# Altium PCB SFarm.PcbDoc (part 1 of 2)
Units mm, origin at the board's own origin, x right, y up, seen from the top; angles counter-clockwise.
Board outline 143 x 80 mm, 2 copper layers (Top Layer, Bottom Layer), stack 1.571 mm thick; 89 components, 71 nets, 378 pads, 342 vias.
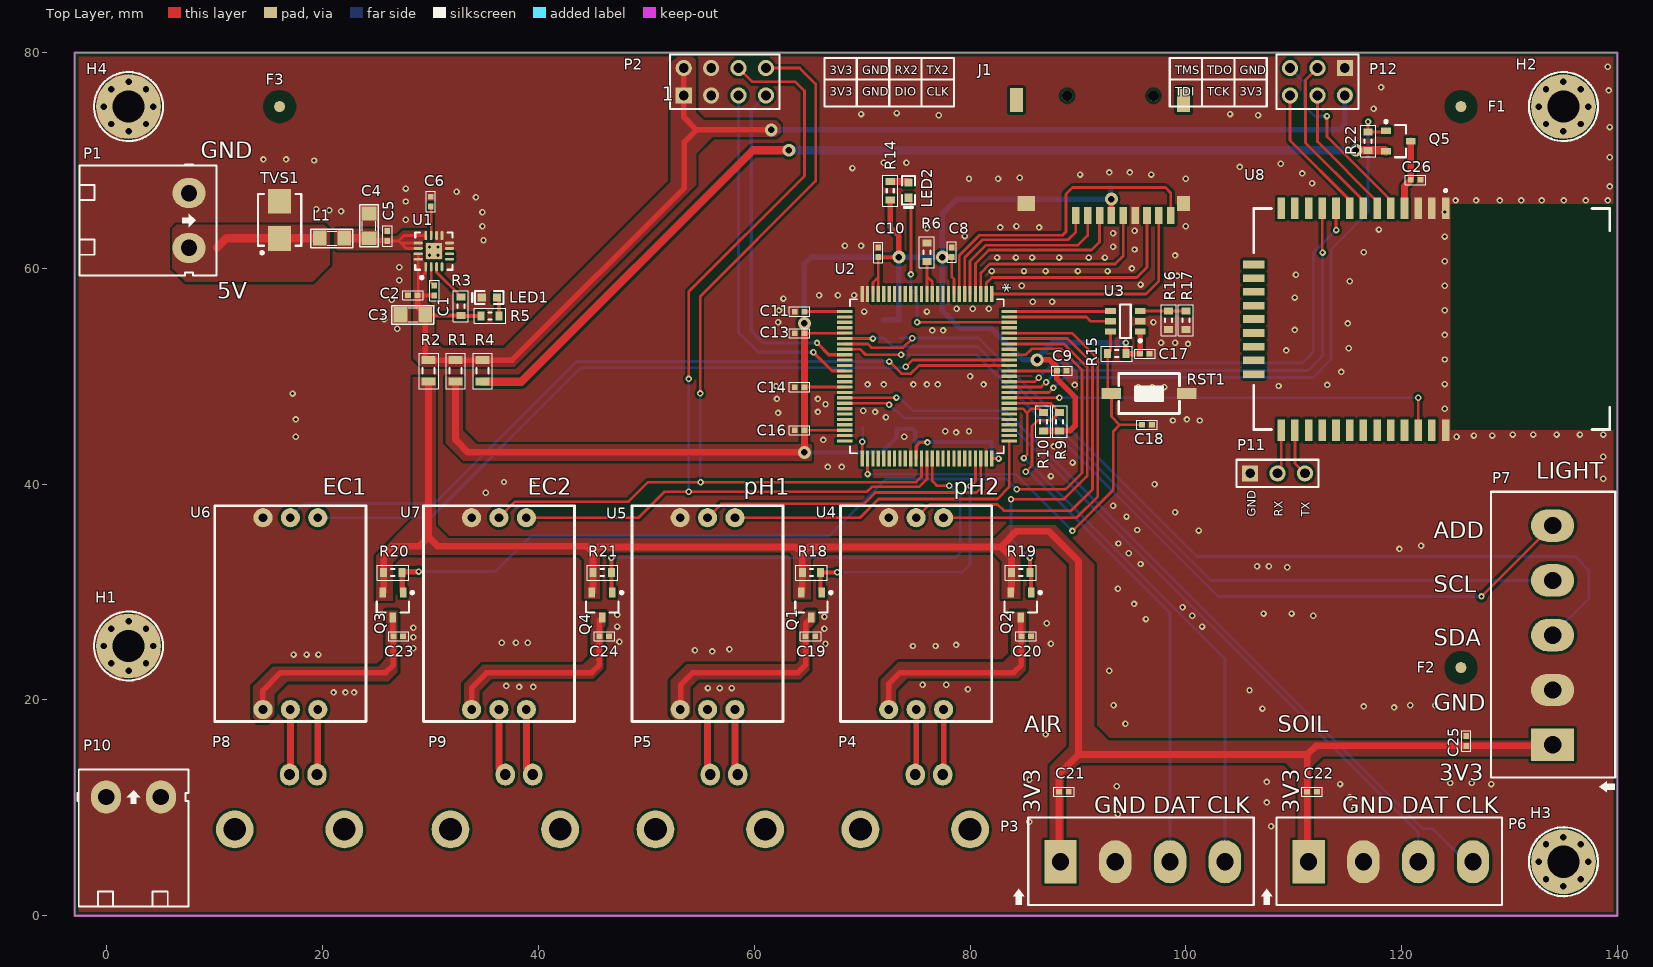
[diagram p0: Top Layer view]
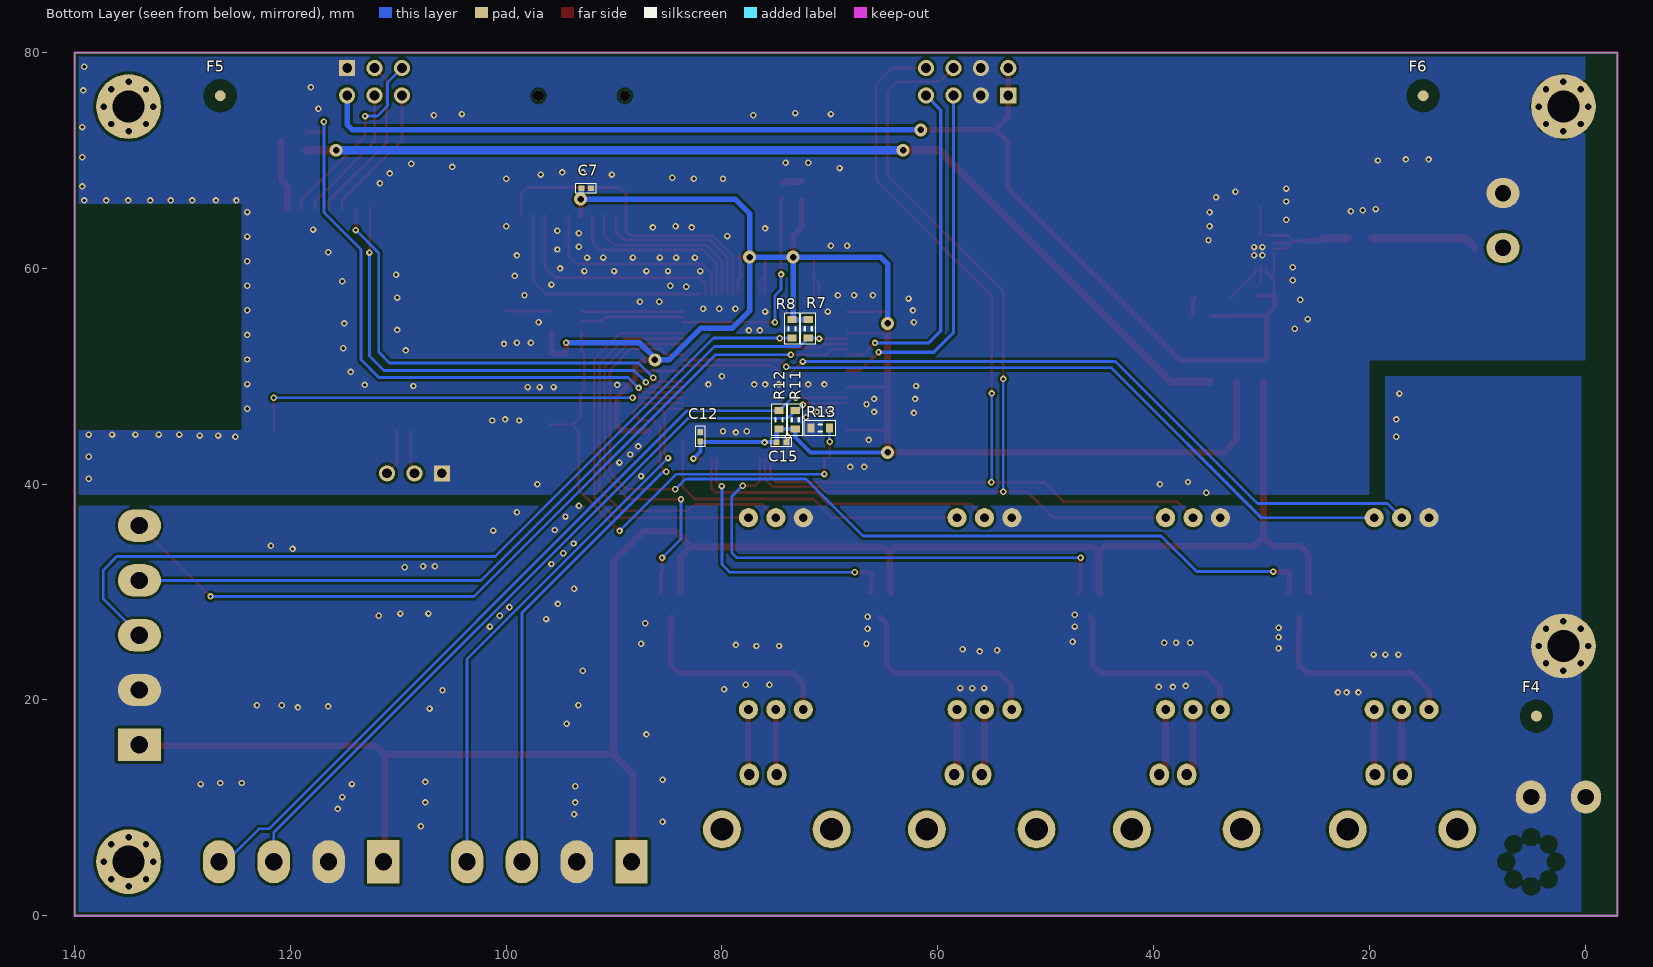
[diagram p1: Bottom Layer view, seen from below]
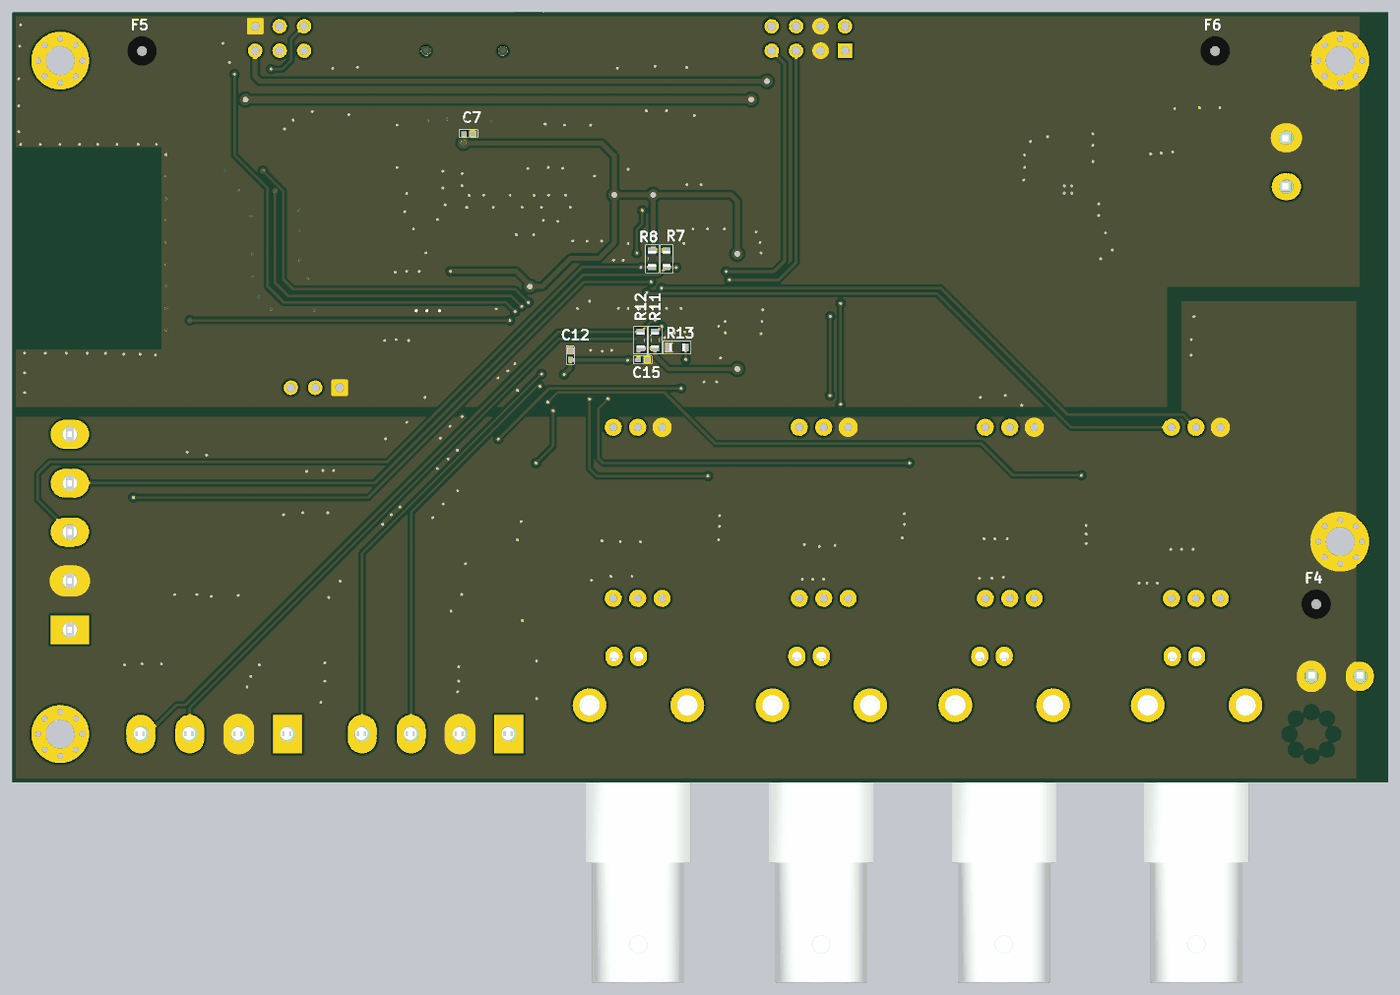
[diagram p2: 3D render of the assembled board from below, using the file's embedded part models]

## Layer stack, top to bottom
Top Solder: solder mask 0.0102, Solder Resist, Dk 3.5
Top Layer: signal copper 0.0356
Dielectric 1: dielectric 1.5, FR-4, Dk 4.8
Bottom Layer: signal copper 0.0356
Bottom Solder: solder mask 0.0102, Solder Resist, Dk 3.5

## Board outline
-3,0 140,0 140,80 -3,80

## Design rules (kind name [scope] priority, off if disabled: settings)
Clearance Clearance_PR [All vs InPolygon] p1: gap=0.254 ignorepadtopadclearanceinfootprint=FALSE
Clearance [All] p2: gap=0.152 ignorepadtopadclearanceinfootprint=FALSE
HoleSize [All] p1: absolutevalues=TRUE maxlimit=25.4 minlimit=0.025 maxpercent=80.000 minpercent=20.000
HoleToHoleClearance [All] p1: gap=0.025 allowstackedmicrovias=TRUE
MinimumSolderMaskSliver [All] p1: minsoldermaskwidth=0.025
PolygonConnect [All] p1: connectstyle=Direct reliefconductorwidth=0.254 reliefentries=4 polygonreliefangle="90 Angle" airgapwidth=0.254
RoutingVias [All] p1: holewidth=0.3 width=0.6 viastyle="Through Hole" minholewidth=0.3 minwidth=0.6 maxholewidth=0.6 maxwidth=1.2
SilkToSilkClearance [All] p1: silktosilkclearance=0.025
SilkToSolderMaskClearance [IsPad] p1: minsilkscreentomaskgap=0.025 clearancetoexposedcopper=TRUE
SolderMaskExpansion [All] p1: expansion=0.102
Width [All] p1: maxlimit=1.016 minlimit=0.203 preferedwidth=0.305
25 further rules are at their usual default settings.

## Classes and differential pairs
component class CONNECTIVITY: C26 P11 P12 Q5 R22 U8
component class MCU: C7 C8 C9 C10 C11 C12 C13 C14 C15 C16 C17 C18 J1 LED2 P2 R6 R7 R8 R9 R10 R11 R12 R13 R14 R15 R16 R17 RST1 U2 U3
component class POWER: C1 C2 C3 C4 C5 C6 F1 F2 F3 H1 H2 H3 H4 L1 LED1 P1 R1 R2 R3 R4 R5 TVS1 U1
component class SENSOR: C19 C20 C21 C22 C23 C24 C25 P3 P4 P5 P6 P7 P8 P9 P10 Q1 Q2 Q3 Q4 R18 R19 R20 R21 U4 U5 U6 U7

## Components (designator, comment, footprint, x,y, rotation, side; value= is the part's Value field where it differs from the comment)
C1 "0.1µF" C0402M 30.35,57.95 r270 top
C2 "0.1µF" C0402M 28.35,57.5 r0 top
C3 "10µF" "0805 cap" 27.214,55.7 r0 top
C4 "10µF" "0805 cap" 24.3,65.086 r270 top
C5 "0.1µF" C0402M 26,63 r270 top
C6 "0.1µF" C0402M 30.023,66.192 r270 top
C7 "0.1µF" C0402M 92.583,67.412 r180 bottom
C8 "0.1µF" C0402M 78.3,61.5 r90 top
C9 "0.1µF" C0402M 88.5,50.5 r0 top
C10 "0.1µF" C0402M 71.501,61.493 r90 top
C11 "0.1µF" C0402M 64.2,56 r180 top
C12 "0.1µF" C0402M 81.991,44.399 r90 bottom
C13 "0.1µF" C0402M 64.2,54 r180 top
C14 "0.1µF" C0402M 64.2,49 r0 top
C15 "0.1µF" C0402M 74.473,43.891 r180 bottom
C16 "0.1µF" C0402M 64.2,45 r0 top
C17 "0.1µF" C0402M 96.2,52.1 r180 top
C18 "0.1µF" C0402M 96.4,45.5 r180 top
C19 "0.1µF" C0402M 65.2,25.9 r180 top
C20 "0.1µF" C0402M 85.2,25.9 r180 top
C21 "0.1µF" C0402M 88.7,11.5 r180 top
C22 "0.1µF" C0402M 111.7,11.5 r180 top
C23 "0.1µF" C0402M 27,25.9 r180 top
C24 "0.1µF" C0402M 46.1,25.9 r180 top
C25 "0.1µF" C0402M 126,16.2 r270 top
C26 "0.1uF" C0402M 121.3,68.2 r180 top
F1 "" fiducials 125.5,75 r0 top
F2 "" fiducials 125.5,23 r0 top
F3 "" fiducials 16,75 r0 top
F4 "" fiducials 4.5,18.5 r180 bottom (schematic designator F3)
F5 "" fiducials 126.5,76 r180 bottom (schematic designator F3)
F6 "" fiducials 15,76 r180 bottom (schematic designator F3)
H1 "HoleM3" HOLEM3via 2,25 r0 top
H2 "HoleM3" HOLEM3via 135,75 r0 top
H3 "HoleM3" HOLEM3via 135,5 r0 top
H4 "HoleM3" HOLEM3via 2,75 r0 top
J1 "Header 11" TF_V3 84.3,75.6 r180 top
L1 "42" 0805F 19.714,62.8 r0 top
LED1 "LedRed0603" 0603LED-RED 35.5,57.3 r180 top
LED2 "LedGreen0603" 0603LED-GREEN 74.3,67.3 r270 top
P1 "Header 2" HED2T 7.6,66.98 r270 top
P2 "Header 4X2H" HDR2X4 53.46,76.03 r0 top
P3 "Header 4H" TERMINAL4_5.08 96,5 r0 top
P4 "BNC connector" BNC 74.92,13.08 r180 top
P5 "BNC connector" BNC 55.92,13.08 r180 top
P6 "Header 4H" TERMINAL4_5.08 119,5 r0 top
P7 "Header 5" TERMINAL5_5.08 134,26 r90 top
P8 "BNC connector" BNC 16.92,13.08 r180 top
P9 "BNC connector" BNC 36.92,13.08 r180 top
P10 "Header 2" HED2T -0.08,11 r0 top
P11 "Header 3" HDR1X3 108.5,41 r0 top
P12 "Header 3X2" HDR2X3 112.2,77.3 r180 top
Q1 "AO3401" SOT23-3N 65.3,28.8 r270 top
Q2 "AO3401" SOT23-3N 84.7,28.8 r270 top
Q3 "AO3401" SOT23-3N 26.5,28.8 r270 top
Q4 "AO3401" SOT23-3N 45.9,28.8 r270 top
Q5 "AO3401" SOT23-3N 119.7,71.8 r0 top
R1 "0" R0805M 32.3,50.5 r270 top
R2 "0" R0805M 29.8,50.5 r270 top
R3 "1.5k" R0603M 32.8,56.5 r270 top
R4 "0" R0805M 34.8,50.5 r270 top
R5 "1k" R0603M 35.5,55.6 r180 top
R6 "10k" R0603M 76,61.5 r270 top
R7 "10k" R0603M 72,54.4 r90 bottom
R8 "10k" R0603M 73.5,54.4 r90 bottom
R9 "10k" R0603M 88.3,45.8 r270 top
R10 "10k" R0603M 86.8,45.8 r270 top
R11 "10k" R0603M 73.2,45.956 r270 bottom
R12 "10k" R0603M 74.7,45.956 r270 bottom
R13 "0.0" R0603M 70.9,45.2 r180 bottom
R14 "1k" R0603M 72.6,67.2 r90 top
R15 "10k" R0603M 93.6,52.1 r180 top
R16 "187k" R0603M 98.4,55.2 r90 top
R17 "182k" R0603M 100,55.2 r90 top
R18 "10k" R0603M 65.3,31.8 r180 top
R19 "10k" R0603M 84.7,31.8 r180 top
R20 "10k" R0603M 26.5,31.8 r180 top
R21 "10k" R0603M 45.9,31.8 r180 top
R22 "10k" R0603M 116.9,71.8 r270 top
RST1 "Button" SWSMD 96.6,48.4 r180 top
TVS1 "SMBJ7.0A" DIOM4436X26N 16,64.5 r90 top
U1 "TPS7A7100" QFN16 30.3,61.6 r90 top
U2 "MK64FN1M0VLL12" LQFP-100_14X14X1 76,50 r270 top
U3 "TPL5010-Q1" SOT23-6 94.4,55.1 r180 top
U4 "pH AFE" "pH AFE" 75,28 r90 top
U5 "pH AFE" "pH AFE" 55.667,28 r90 top
U6 "pH AFE" "pH AFE" 17,28 r90 top
U7 "pH AFE" "pH AFE" 36.333,28 r90 top
U8 "VZIGMOD1" VZIGMOD2 106.3,65.56 r270 top

## Footprints (in the part's own frame and the unit in brackets; to place one, negate y for a bottom-side part, rotate by r counter-clockwise, add the part's x,y. Pads: shape width x height; smd on the part's side, far side on the other; paste and mask are expansions set on the pad)
0603LED-GREEN [mil]
  rect 30x30 smd: 1(-26,0) 2(30,0)
  silkscreen extent -50,-24 65,24, body extent -29,-16 33,16, height 24
0603LED-RED [mil]
  rect 30x30 smd: 1(-26,0) 2(30,0)
  silkscreen extent -50,-24 65,24, body extent -31,-16 32,16, height 24
"0805 cap" [mil]
  rect 50x55 smd: 1(0,0) 2(90,0)
  silkscreen extent -32,-34 121,33, body extent 5,-27 85,23, height 24
0805F [mil]
  rect 50x55 smd: 1(0,0) 2(90,0)
  silkscreen extent -32,-34 121,33, body extent 6,-27 85,23, height 33
BNC [mm] "BNC connector"
  oval 1.778x2.032 hole 1: 1(0,0) 2(-2.54,0)
  round 3.5 hole 2.1: 3(-5.08,5.08) 3(5.08,5.08)
  body extent -7.41,-1.82 7.35,33.93, height 15.21
C0402M [mm] "Capacitor 0402"
  rect 0.55x0.51 smd: 1(-0.45,0) 2(0.45,0)
  silkscreen extent -0.95,-0.43 0.95,0.43, body extent -0.53,-0.28 0.53,0.27, height 0.55
DIOM4436X26N [mm] "Molded Diode, 2-Leads, Body 4.40x3.62mm, IPC Medium Density"
  rect 2.3x2.15 smd: 1(1.725,0) 2(-1.725,0)
  silkscreen extent -3.17,-2 2.4,2, body extent -2.6,-1.97 2.6,1.97, height 2.61
fiducials [mil]
  round 40 smd mask+40: ""(0,0)
  Top Layer pour cut-out: 0,-60 -22.96,-55.43 -42.43,-42.43 -55.43,-22.96 -60,0 -60,0 -55.43,22.96 -42.43,42.43 -22.96,55.43 0,60 0,60 22.96,55.43 42.43,42.43 55.43,22.96 60,0 60,0 55.43,-22.96 42.43,-42.43 22.96,-55.43 0,-60
HDR1X3 [mm] "Connector; Header; 3 Position"
  rect 1.5x1.5 hole 0.9: 1(-2.54,0)
  round 1.5 hole 0.9: 2(0,0) 3(2.54,0)
  silkscreen extent -3.81,-1.27 3.81,1.27
HDR2X3 [mm] "Connector; Header; 3x2 Position"
  rect 1.5x1.5 hole 0.9: 1(-2.54,-1.27)
  round 1.5 hole 0.9: 2(-2.54,1.27) 3(0,-1.27) 4(0,1.27) 5(2.54,-1.27) 6(2.54,1.27)
  silkscreen extent -3.81,-2.54 3.81,2.54
HDR2X4 [mm] "Connector; Header; 4x2 Position"
  rect 1.5x1.5 hole 0.9: 1(0,0)
  round 1.5 hole 0.9: 2(0,2.54) 3(2.54,0) 4(2.54,2.54) 5(5.08,0) 6(5.08,2.54) 7(7.62,0) 8(7.62,2.54)
  silkscreen extent -1.27,-1.27 8.89,3.81
HED2T [mil] "Header 2, 2 pin, hight 300mil, Pin to Pin 200, Colour Green"
  oval 110x120 hole 60: 1(0,0) 2(200,0)
  silkscreen extent -105,-400 300,100, body extent -97,-399 297,73, height 334
HOLEM3via [mm]
  round 6 hole 3: ""(0,0)
  silkscreen extent -3.19,-3.2 3.2,3.2
LQFP-100_14X14X1 [mm]
  rect 1.461x0.3 smd: 1(-7.625,6) 2(-7.625,5.5) 3(-7.625,5) 4(-7.625,4.5) 5(-7.625,4) 6(-7.625,3.5) 7(-7.625,3) 8(-7.625,2.5) 9(-7.625,2) 10(-7.625,1.5) 11(-7.625,1) 12(-7.625,0.5) 13(-7.625,0) 14(-7.625,-0.5) 15(-7.625,-1) 16(-7.625,-1.5) 17(-7.625,-2) 18(-7.625,-2.5) 19(-7.625,-3) 20(-7.625,-3.5) 21(-7.625,-4) 22(-7.625,-4.5) 23(-7.625,-5) 24(-7.625,-5.5) 25(-7.625,-6) 51(7.625,-6) 52(7.625,-5.5) 53(7.625,-5) 54(7.625,-4.5) 55(7.625,-4) 56(7.625,-3.5) 57(7.625,-3) 58(7.625,-2.5) 59(7.625,-2) 60(7.625,-1.5) 61(7.625,-1) 62(7.625,-0.5) 63(7.625,0) 64(7.625,0.5) 65(7.625,1) 66(7.625,1.5) 67(7.625,2) 68(7.625,2.5) 69(7.625,3) 70(7.625,3.5) 71(7.625,4) 72(7.625,4.5) 73(7.625,5) 74(7.625,5.5) 75(7.625,6)
  rect 0.3x1.461 smd: 26(-6,-7.625) 27(-5.5,-7.625) 28(-5,-7.625) 29(-4.5,-7.625) 30(-4,-7.625) 31(-3.5,-7.625) 32(-3,-7.625) 33(-2.5,-7.625) 34(-2,-7.625) 35(-1.5,-7.625) 36(-1,-7.625) 37(-0.5,-7.625) 38(0,-7.625) 39(0.5,-7.625) 40(1,-7.625) 41(1.5,-7.625) 42(2,-7.625) 43(2.5,-7.625) 44(3,-7.625) 45(3.5,-7.625) 46(4,-7.625) 47(4.5,-7.625) 48(5,-7.625) 49(5.5,-7.625) 50(6,-7.625) 76(6,7.625) 77(5.5,7.625) 78(5,7.625) 79(4.5,7.625) 80(4,7.625) 81(3.5,7.625) 82(3,7.625) 83(2.5,7.625) 84(2,7.625) 85(1.5,7.625) 86(1,7.625) 87(0.5,7.625) 88(0,7.625) 89(-0.5,7.625) 90(-1,7.625) 91(-1.5,7.625) 92(-2,7.625) 93(-2.5,7.625) 94(-3,7.625) 95(-3.5,7.625) 96(-4,7.625) 97(-4.5,7.625) 98(-5,7.625) 99(-5.5,7.625) 100(-6,7.625)
  silkscreen extent -7.13,-7.13 7.13,7.13, body extent -6.86,-6.86 6.86,6.86, height 0.3
"pH AFE" [mil]
  round 70 hole 31.5: 1(-350,100) 2(-350,0) 3(-350,-100) 4(350,-100) 5(350,0) 6(350,100)
  silkscreen extent -394,-276 394,276, body extent -394,-275 393,276, height 79
QFN16 [mm] "QFN, 16-Leads, Body 3.00x3.00mm, Pitch 0.50mm, Thermal Pad 1.66x1.66mm, IPC Medium Density"
  oval 0.85x0.25 smd: 1(-1.45,0.75) 2(-1.45,0.25) 3(-1.45,-0.25) 4(-1.45,-0.75) 9(1.45,-0.75) 10(1.45,-0.25) 11(1.45,0.25) 12(1.45,0.75)
  oval 0.25x0.85 smd: 5(-0.75,-1.45) 6(-0.25,-1.45) 7(0.25,-1.45) 8(0.75,-1.45) 13(0.75,1.45) 14(0.25,1.45) 15(-0.25,1.45) 16(-0.75,1.45)
  rect 1.5x1.5 smd: 17(0,0)
  silkscreen extent -2.57,-1.73 1.73,1.73, body extent -1.58,-1.58 1.58,1.58, height 1
R0603M [mm] "Chip Resistor 0603"
  rect 0.65x0.85 smd: 1(-0.85,0) 2(0.85,0)
  silkscreen extent -1.45,-0.7 1.45,0.7, body extent -0.8,-0.4 0.8,0.4, height 0.55
R0805M [mm] "Chip Resistor 0805"
  rect 0.75x1.3 smd: 1(-1,0) 2(1,0)
  silkscreen extent -1.65,-0.9 1.65,0.9, body extent -1,-0.63 1,0.63, height 0.6
SOT23-3N [mm] "SOT23, 3-Leads, Body 2.90x2.30mm, Pitch 0.95mm, IPC Medium Density"
  rect 0.9x0.6 smd: 1(-1.15,0.95) 2(-1.15,-0.95) 3(1.15,0)
  silkscreen extent -1.27,-1.5 0.7,1.93, body extent -0.7,-1.5 0.7,1.5, height 1.1
SOT23-6 [mm] "SOT23, 6-Leads, Body 2.90x2.80mm, Pitch 0.95mm, IPC Medium Density"
  rect 1x0.6 smd: 1(-1.375,0.95) 2(-1.375,0) 3(-1.375,-0.95) 4(1.375,-0.95) 5(1.375,0) 6(1.375,0.95)
  silkscreen extent -1.5,-1.55 0.5,1.92, body extent -0.88,-1.52 0.87,1.53, height 1.45
SWSMD [mm]
  rect 1.8x1 smd: 1(-3.5,0) 2(3.5,0)
  silkscreen extent -2.82,-1.85 2.82,1.85, body extent -3.05,-1.85 3.05,1.85, height 2.5
TERMINAL4_5.08 [mm]
  rect 3x4 hole 1.6: 1(-7.62,0)
  oval 3x4 hole 1.6: 2(-2.54,0) 3(2.54,0) 4(7.62,0)
  silkscreen extent -12,-4 10.3,4.1, body extent -10.64,-4 10.25,4.1, height 10
TERMINAL5_5.08 [mm]
  rect 3x4 hole 1.6: 1(-10.16,0)
  oval 3x4 hole 1.6: 2(-5.08,0) 3(0,0) 4(5.08,0) 5(10.16,0)
  silkscreen extent -14.54,-5.8 13.3,5.7, body extent -13.29,-5.9 13.29,5.72, height 18
TF_V3 [mm]
  round 1 hole 1: 0(-12.7,-0.4) 0(-4.7,-0.4)
  rect 0.7x1.6 smd: 1(-5.5,10.7) 2(-6.6,10.7) 3(-7.7,10.7) 4(-8.8,10.7) 5(-9.9,10.7) 6(-11,10.7) 7(-12.1,10.7) 8(-13.2,10.7) 9(-14.3,10.7)
  rect 1.2x1.4 smd: 10(-15.5,9.6)
  rect 1.6x1.4 smd: 11(-0.9,9.6)
  rect 1.2x2.2 smd: 12(0,0) 13(-15.5,0)
  body extent -15.79,-4.46 0.31,10.54, height 1.85
VZIGMOD2 [mm]
  rect 2x0.7 smd: 1(0,17.78) 2(0,16.51) 3(0,15.24) 4(0,13.97) 5(0,12.7) 6(0,11.43) 7(0,10.16) 8(0,8.89) 9(0,7.62) 10(0,6.35) 11(0,5.08) 12(0,3.81) 13(0,2.54) 23(20.56,2.54) 24(20.56,3.81) 25(20.56,5.08) 26(20.56,6.35) 27(20.56,7.62) 28(20.56,8.89) 29(20.56,10.16) 30(20.56,11.43) 31(20.56,12.7) 32(20.56,13.97) 33(20.56,15.24) 34(20.56,16.51) 35(20.56,17.78)
  rect 0.7x2 smd: 14(5.2,0) 15(6.47,0) 16(7.74,0) 17(9.01,0) 18(10.25,0) 19(11.55,0) 20(12.82,0) 21(14.09,0) 22(15.36,0)
  silkscreen extent -1.79,0 20.5,33, body extent 0,0 20.5,33, height 2.05

## Part data
C1 C2 C5 C6 C7 C8 C9 C10 C11 C12 C13 C14 C15 C16 C17 C18 C19 C20 C21 C22 C23 C24 C25: library part CAP0.1u0402, "CAP CER 0.1UF 10V X7R 0402", Manufacturer="Taiyo Yuden", Manufacturer Part Number=LMK105B7104KVHF, Operating Temperature="-55°C ~ 125°C", Package / Case="0402 (1005 Metric)", Ratings=AEC-Q200, Supplier Part Number 1=587-3769-1-ND, Temperature Coefficient=X7R, Tolerance=±10%, Voltage - Rated=10V, Applications=Automotive, Capacitance=0.1µF, Category=Capacitors, ComponentLink1Description=http://www.yuden.co.jp/productdata/catalog/en/mlcc_all_hq_e.pdf, ComponentLink1URL=http://www.yuden.co.jp/productdata/catalog/en/mlcc_all_hq_e.pdf, Features=-, Height - Seated (Max)=-, Lead Spacing=-, Lead Style=-, Mounting Type="Surface Mount, MLCC", Packaging="Cut Tape (CT)", Part Status=Active, Pricing 1="1=0.1, 10=0.05, 100=0.0223, 500=0.01594, 1000=0.01252, 2500=0.01138, 5000=0.01047 (USD)", RoHS="RoHS Compliant", Size / Dimension="0.039\" L x 0.020\" W (1.00mm x 0.50mm)", Stock 1=23930, Supplier 1=Digi-Key, Thickness (Max)="0.022\" (0.55mm)"
C3 C4: library part cap10u0805, "CAP CER 10UF 16V X7R 0805", Manufacturer="Taiyo Yuden", Manufacturer Part Number=EMK212BB7106MG-T, Operating Temperature="-55°C ~ 125°C", Package / Case="0805 (2012 Metric)", Ratings=-, Supplier Part Number 1=587-3319-1-ND, Temperature Coefficient=X7R, Tolerance=±20%, Voltage - Rated=16V, Applications="General Purpose", Capacitance=10µF, Category=Capacitors, ComponentLink1Description=http://www.yuden.co.jp/productdata/catalog/en/mlcc06_e.pdf, ComponentLink1URL=http://www.yuden.co.jp/productdata/catalog/en/mlcc06_e.pdf, Features=-, Height - Seated (Max)=-, Lead Spacing=-, Lead Style=-, Mounting Type="Surface Mount, MLCC", Packaging="Cut Tape (CT)", Part Status=Active, Pricing 1="1=0.51, 10=0.351, 100=0.2106, 500=0.15798, 1000=0.1334 (USD)", RoHS="RoHS Compliant", Size / Dimension="0.079\" L x 0.049\" W (2.00mm x 1.25mm)", Stock 1=221600, Supplier 1=Digi-Key, Thickness (Max)="0.053\" (1.35mm)"
C26: library part CAP0.1u0402, "CAP CER 0.1UF 16V X7R 0402", Manufacturer="Samsung Electro-Mechanics", Manufacturer Part Number=CL05B104KO5NNNC, Operating Temperature="-55°C ~ 125°C", Package / Case="0402 (1005 Metric)", Ratings=-, Supplier Part Number 1=1276-1001-6-ND, Temperature Coefficient=X7R, Tolerance=±10%, Voltage - Rated=16V, Applications="General Purpose", Category=Capacitors, ComponentLink1Description=http://www.samsungsem.com/kr/support/product-search/mlcc/CL05B104KO5NNNC.jsp, ComponentLink1URL=http://www.samsungsem.com/kr/support/product-search/mlcc/CL05B104KO5NNNC.jsp, Features=-, Height - Seated (Max)=-, Lead Spacing=-, Lead Style=-, Module=Connectivity, Mounting Type="Surface Mount, MLCC", Notification="Current market demand for these product types have resulted in fluctuating and extending lead times. Lead times may differ.", Packaging=Digi-Reel®, Part Status=Active, Pricing 1="1=0.1, 10=0.03, 100=0.0134, 500=0.00958, 1000=0.00753, 2500=0.00684, 5000=0.0063 (USD)", RoHS="RoHS Compliant", Size / Dimension="0.039\" L x 0.020\" W (1.00mm x 0.50mm)", Stock 1=100000, Supplier 1=Digi-Key, Thickness (Max)="0.022\" (0.55mm)"
F1 F2 F3 F4 F5 F6: library part Fiducials
J1: "Header, 11-Pin", LatestRevisionDate=17-Jul-2002, LatestRevisionNote="Re-released for DXP Platform.", Module=Micro-SD, Publisher="Altium Limited"
L1: library part "Ferrite Bead", "FERRITE BEAD 42 OHM 0805 1LN", Current Rating (Max)=4A, DC Resistance (DCR) (Max)="8 mOhm", Impedance @ Frequency="42 Ohm @ 100MHz", Manufacturer="Taiyo Yuden", Manufacturer Part Number=FBMJ2125HS420-TV, Operating Temperature="-40°C ~ 125°C", Package / Case="0805 (2012 Metric)", Ratings=AEC-Q200, Supplier Part Number 1=587-3851-6-ND, Category=Filters, ComponentLink1Description=http://ds.yuden.co.jp/TYCOMPAS/ut/detail.do?productNo=FBMJ2125HS420-TV&fileName=FBMJ2125HS420-TV_SS&mode=specSheetDownload, ComponentLink1URL=http://ds.yuden.co.jp/TYCOMPAS/ut/detail.do?productNo=FBMJ2125HS420-TV&fileName=FBMJ2125HS420-TV_SS&mode=specSheetDownload, Filter Type="Power Line", Height (Max)="0.041\" (1.05mm)", Mounting Type="Surface Mount", Number of Lines=1, Packaging=Digi-Reel®, Part Status=Active, Pricing 1="1=0.2, 10=0.154, 25=0.1276, 50=0.11, 100=0.099, 250=0.0836, 500=0.0748, 1000=0.0638 (USD)", RoHS="RoHS Compliant", Size / Dimension="0.079\" L x 0.049\" W (2.00mm x 1.25mm)", Stock 1=2013, Supplier 1=Digi-Key
LED1: "LED RED CLEAR 0603 SMD", Color=Red, Current - Test=20mA, Lens Color=Colorless, Manufacturer="Everlight Electronics Co Ltd", Manufacturer Part Number=QTLP600C7TR, Millicandela Rating=20mcd, Package / Case="0603 (1608 Metric)", Supplier Part Number 1=1080-1400-1-ND, Voltage - Forward (Vf) (Typ)=1.9V, Category=Optoelectronics, ComponentLink1Description=http://media.digikey.com/pdf/Data%20Sheets/Everlight%20PDFs/QTLP600C.pdf, ComponentLink1URL=http://media.digikey.com/pdf/Data%20Sheets/Everlight%20PDFs/QTLP600C.pdf, Features=-, Height (Max)=0.80mm, Lens Style/Size="Rectangle with Flat Top, 1.20mm x 0.80mm", Lens Transparency=Clear, Mounting Type="Surface Mount", Packaging="Cut Tape (CT)", Part Status=Active, Pricing 1="1=0.41, 10=0.297, 25=0.2276, 100=0.1485, 250=0.10892, 500=0.0924, 1000=0.0759 (USD)", RoHS="RoHS Compliant", Size / Dimension="1.60mm L x 0.80mm W", Stock 1=19325, Supplier 1=Digi-Key, Viewing Angle=100°, Wavelength - Dominant=645nm, Wavelength - Peak=660nm
LED2: "LED GREEN CLEAR 0603 SMD", Color=Green, Current - Test=20mA, Lens Color=Colorless, Manufacturer="Everlight Electronics Co Ltd", Manufacturer Part Number=QTLP601C4TR, Millicandela Rating=15mcd, Package / Case="0603 (1608 Metric)", Supplier Device Package=0603, Supplier Part Number 1=1080-1405-1-ND, Voltage - Forward (Vf) (Typ)=2.1V, Category=Optoelectronics, ComponentLink1Description=http://media.digikey.com/pdf/Data%20Sheets/Everlight%20PDFs/QTLP601C-2,3,4,7,B.pdf, ComponentLink1URL=http://media.digikey.com/pdf/Data%20Sheets/Everlight%20PDFs/QTLP601C-2,3,4,7,B.pdf, Features=-, Height (Max)=0.60mm, Lens Style/Size="Rectangle with Flat Top, 1.20mm x 0.80mm", Lens Transparency=Clear, Mounting Type="Surface Mount", Packaging="Cut Tape (CT)", Part Status=Active, Pricing 1="1=0.51, 10=0.366, 25=0.2808, 100=0.1832, 250=0.13432, 500=0.11396, 1000=0.09361 (USD)", RoHS="RoHS Compliant", Size / Dimension="1.60mm L x 0.80mm W", Stock 1=19080, Supplier 1=Digi-Key, Viewing Angle=120°, Wavelength - Dominant=570nm, Wavelength - Peak=565nm
P1 P10: "Header, 2-Pin", LatestRevisionDate=17-Jul-2002, LatestRevisionNote="Re-released for DXP Platform.", Publisher="Altium Limited"
P2: "Header, 4-Pin, Dual row, Right Angle", LatestRevisionDate=17-Jul-2002, LatestRevisionNote="Re-released for DXP Platform.", Publisher="Altium Limited"
P3 P6: "TERM BLOCK PLUG 4POS STR 5.08MM", Color=Green, Current - IEC=12A, Manufacturer="Phoenix Contact", Manufacturer Part Number=1758377, Material Flammability Rating="UL94 V-0", Operating Temperature=-, Supplier Part Number 1=277-1966-ND, Category="Connectors, Interconnects", ComponentLink1Description=https://media.digikey.com/PDF/Data%20Sheets/Phoenix%20Contact%20PDFs/1758377.pdf, ComponentLink1URL=https://media.digikey.com/PDF/Data%20Sheets/Phoenix%20Contact%20PDFs/1758377.pdf, Contact Material=-, Contact Mating Finish=Tin, Contact Tail Length=-, Features="Positions Stamped, Retention Latches (Non-Wire Side)", Header Orientation=-, Housing Material="Polyamide (PA), Nylon", Ingress Protection=-, Insulation Height="0.591\" (15.00mm)", LatestRevisionDate=17-Jul-2002, LatestRevisionNote="Re-released for DXP Platform.", Mounting Type="Free Hanging (In-Line)", Number of Levels=1, Number of Positions=4, Packaging=Bulk, Part Status=Active, Pitch="0.200\" (5.08mm)", Plug Wire Entry=180°, Positions Per Level=4, Pricing 1="1=4.13, 10=3.949, 50=3.8412, 100=3.59, 250=3.30284, 500=3.0515, 1000=2.90793, 2500=2.7284 (USD)", Publisher="Altium Limited", RoHS="RoHS Compliant", Screw Size=M3, Stock 1=185, Supplier 1=Digi-Key, Termination Style="Screw - Clamping Yoke (Tension Sleeve)", Torque - Screw="0.5-0.6 Nm (4.4-5.3 Lb-In)", Type="Plug, Female Sockets", Wire Gauge or Range - AWG="12-30 AWG", Wire Gauge or Range - mm²=0.2-2.5mm², Wire Strip Length=7mm
P7: "TERM BLOCK PLUG 5POS STR 5.08MM", Color=Green, Current - IEC=12A, Manufacturer="Phoenix Contact", Manufacturer Part Number=1757048, Material Flammability Rating="UL94 V-0", Operating Temperature=-, Supplier Part Number 1=277-1014-ND, Category="Connectors, Interconnects", ComponentLink1Description=https://media.digikey.com/pdf/Data%20Sheets/Phoenix%20Contact%20PDFs/1757048.pdf, ComponentLink1URL=https://media.digikey.com/pdf/Data%20Sheets/Phoenix%20Contact%20PDFs/1757048.pdf, Contact Material=-, Contact Mating Finish=Tin, Contact Tail Length=-, Features="Retention Latches (Non-Wire Side)", Header Orientation=-, Housing Material="Polyamide (PA), Nylon", Ingress Protection=-, Insulation Height="0.591\" (15.00mm)", LatestRevisionDate=17-Jul-2002, LatestRevisionNote="Re-released for DXP Platform.", Mounting Type="Free Hanging (In-Line)", Number of Levels=1, Number of Positions=5, Packaging=Bulk, Part Status=Active, Pitch="0.200\" (5.08mm)", Plug Wire Entry=180°, Positions Per Level=5, Pricing 1="1=4.69, 10=4.488, 50=4.3656, 100=4.08, 250=3.75364, 500=3.46802, 1000=3.30483, 2500=3.1008 (USD)", Publisher="Altium Limited", RoHS="RoHS Compliant", Screw Size=M3, Stock 1=1718, Supplier 1=Digi-Key, Termination Style="Screw - Clamping Yoke (Tension Sleeve)", Torque - Screw="0.5-0.6 Nm (4.4-5.3 Lb-In)", Type="Plug, Female Sockets", Wire Gauge or Range - AWG="12-30 AWG", Wire Gauge or Range - mm²=0.2-2.5mm², Wire Strip Length=7mm
P11: "Header, 3-Pin", LatestRevisionDate=17-Jul-2002, LatestRevisionNote="Re-released for DXP Platform.", Publisher="Altium Limited"
P12: "Header, 3-Pin, Dual row", LatestRevisionDate=17-Jul-2002, LatestRevisionNote="Re-released for DXP Platform.", Publisher="Altium Limited"
Q1 Q2 Q3 Q4 Q5: library part MOSFET-P1, "P-Channel MOSFET"
R1 R2 R4: library part RES00805, "RES SMD 0.0 OHM JUMPER 1/8W 0805", Manufacturer="Panasonic Electronic Components", Manufacturer Part Number=ERJ-6GEY0R00V, Operating Temperature="-55°C ~ 155°C", Package / Case="0805 (2012 Metric)", Power (Watts)="0.125W, 1/8W", Resistance (Ohms)=0.0, Supplier Device Package=0805, Supplier Part Number 1=P0.0ACT-ND, Temperature Coefficient=-, Tolerance=Jumper, Category=Resistors, ComponentLink1Description=http://industrial.panasonic.com/www-cgi/jvcr13pz.cgi?E+PZ+3+AOA0001+ERJ6GEY0R00V+7+WW, ComponentLink1URL=http://industrial.panasonic.com/www-cgi/jvcr13pz.cgi?E+PZ+3+AOA0001+ERJ6GEY0R00V+7+WW, Composition="Thick Film", Failure Rate=-, Features="Automotive AEC-Q200", Height - Seated (Max)="0.028\" (0.70mm)", Packaging="Cut Tape (CT)", Part Status=Active, Pricing 1="1=0.1, 10=0.024, 25=0.0172, 50=0.0132, 100=0.0097, 250=0.00744, 500=0.00594, 1000=0.00437 (USD)", RoHS="RoHS Compliant", Size / Dimension="0.079\" L x 0.049\" W (2.00mm x 1.25mm)", Stock 1=562130, Supplier 1=Digi-Key
R3: library part RES1k50603, "RES SMD 1.5K OHM 1% 1/10W 0603", Manufacturer="Panasonic Electronic Components", Manufacturer Part Number=ERJ-3EKF1501V, Operating Temperature="-55°C ~ 155°C", Package / Case="0603 (1608 Metric)", Power (Watts)="0.1W, 1/10W", Supplier Device Package=0603, Supplier Part Number 1=P1.50KHCT-ND, Temperature Coefficient=±100ppm/°C, Tolerance=±1%, Category=Resistors, ComponentLink1Description=https://industrial.panasonic.com/cdbs/www-data/pdf/RDA0000/AOA0000C298.pdf, ComponentLink1URL=https://industrial.panasonic.com/cdbs/www-data/pdf/RDA0000/AOA0000C298.pdf, Composition="Thick Film", Failure Rate=-, Features="Automotive AEC-Q200", Height - Seated (Max)="0.022\" (0.55mm)", Packaging="Cut Tape (CT)", Part Status=Active, Pricing 1="1=0.1, 10=0.021, 100=0.0087, 1000=0.00389, 2500=0.00338 (USD)", Resistance (Ohms)=1.5k, RoHS="RoHS Compliant", Size / Dimension="0.063\" L x 0.031\" W (1.60mm x 0.80mm)", Stock 1=0, Supplier 1=Digi-Key
R5 R14: library part RES1k0603, "RES SMD 1K OHM 1% 1/10W 0603", Manufacturer="Panasonic Electronic Components", Manufacturer Part Number=ERJ-3EKF1001V, Operating Temperature="-55°C ~ 155°C", Package / Case="0603 (1608 Metric)", Power (Watts)="0.1W, 1/10W", Supplier Device Package=0603, Supplier Part Number 1=P1.00KHDKR-ND, Temperature Coefficient=±100ppm/°C, Tolerance=±1%, Category=Resistors, ComponentLink1Description=https://industrial.panasonic.com/cdbs/www-data/pdf/RDA0000/AOA0000C298.pdf, ComponentLink1URL=https://industrial.panasonic.com/cdbs/www-data/pdf/RDA0000/AOA0000C298.pdf, Composition="Thick Film", Failure Rate=-, Features="Automotive AEC-Q200", Height - Seated (Max)="0.022\" (0.55mm)", Packaging=Digi-Reel®, Part Status=Active, Pricing 1="1=0.1, 10=0.021, 100=0.0087, 1000=0.00389, 2500=0.00338 (USD)", Resistance (Ohms)=1k, RoHS="RoHS Compliant", Size / Dimension="0.063\" L x 0.031\" W (1.60mm x 0.80mm)", Stock 1=0, Supplier 1=Digi-Key
R6 R7 R8 R9 R10 R11 R12 R15 R18 R19 R20 R21 R22: library part RES10k0603, "RES SMD 10K OHM 1% 1/10W 0603", Manufacturer="Panasonic Electronic Components", Manufacturer Part Number=ERJ-3EKF1002V, Operating Temperature="-55°C ~ 155°C", Package / Case="0603 (1608 Metric)", Power (Watts)="0.1W, 1/10W", Supplier Device Package=0603, Supplier Part Number 1=P10.0KHDKR-ND, Temperature Coefficient=±100ppm/°C, Tolerance=±1%, Category=Resistors, ComponentLink1Description=https://industrial.panasonic.com/cdbs/www-data/pdf/RDA0000/AOA0000C298.pdf, ComponentLink1URL=https://industrial.panasonic.com/cdbs/www-data/pdf/RDA0000/AOA0000C298.pdf, Composition="Thick Film", Failure Rate=-, Features="Automotive AEC-Q200", Height - Seated (Max)="0.022\" (0.55mm)", Packaging=Digi-Reel®, Part Status=Active, Pricing 1="1=0.1, 10=0.021, 100=0.0087, 1000=0.00389, 2500=0.00338 (USD)", Resistance (Ohms)=10k, RoHS="RoHS Compliant", Size / Dimension="0.063\" L x 0.031\" W (1.60mm x 0.80mm)", Stock 1=0, Supplier 1=Digi-Key
R13: library part RES00603, "RES SMD 0.0OHM JUMPER 1/10W 0603", Manufacturer="Panasonic Electronic Components", Manufacturer Part Number=ERJ-3GEY0R00V, Operating Temperature="-55°C ~ 155°C", Package / Case="0603 (1608 Metric)", Power (Watts)="0.1W, 1/10W", Supplier Device Package=0603, Supplier Part Number 1=P0.0GCT-ND, Temperature Coefficient=-, Tolerance=Jumper, Category=Resistors, ComponentLink1Description=http://industrial.panasonic.com/www-cgi/jvcr13pz.cgi?E+PZ+3+AOA0001+ERJ3GEY0R00V+7+WW, ComponentLink1URL=http://industrial.panasonic.com/www-cgi/jvcr13pz.cgi?E+PZ+3+AOA0001+ERJ3GEY0R00V+7+WW, Composition="Thick Film", Failure Rate=-, Features="Automotive AEC-Q200", Height - Seated (Max)="0.022\" (0.55mm)", Packaging="Cut Tape (CT)", Part Status=Active, Pricing 1="1=0.1, 10=0.016, 25=0.0116, 50=0.0088, 100=0.0065, 250=0.00496, 500=0.00396, 1000=0.00292 (USD)", Resistance (Ohms)=0.0, RoHS="RoHS Compliant", Size / Dimension="0.063\" L x 0.031\" W (1.60mm x 0.80mm)", Stock 1=8597757, Supplier 1=Digi-Key
R16: library part Resistor, "RES SMD 187K OHM 1% 1/10W 0603", Manufacturer="Panasonic Electronic Components", Manufacturer Part Number=ERJ-3EKF1873V, Operating Temperature="-55°C ~ 155°C", Package / Case="0603 (1608 Metric)", Power (Watts)="0.1W, 1/10W", Supplier Device Package=0603, Supplier Part Number 1=P187KHCT-ND, Temperature Coefficient=±100ppm/°C, Tolerance=±1%, Category=Resistors, ComponentLink1Description=https://industrial.panasonic.com/cdbs/www-data/pdf/RDA0000/AOA0000C298.pdf, ComponentLink1URL=https://industrial.panasonic.com/cdbs/www-data/pdf/RDA0000/AOA0000C298.pdf, Composition="Thick Film", Failure Rate=-, Features="Automotive AEC-Q200", Height - Seated (Max)="0.022\" (0.55mm)", Packaging="Cut Tape (CT)", Part Status=Active, Pricing 1="1=0.1, 10=0.021, 100=0.0087, 1000=0.00389, 2500=0.00338 (USD)", Resistance (Ohms)=187k, RoHS="RoHS Compliant", Size / Dimension="0.063\" L x 0.031\" W (1.60mm x 0.80mm)", Stock 1=17711, Supplier 1=Digi-Key
R17: library part Resistor, "RES SMD 182K OHM 1% 1/10W 0603", Manufacturer="Panasonic Electronic Components", Manufacturer Part Number=ERJ-3EKF1823V, Operating Temperature="-55°C ~ 155°C", Package / Case="0603 (1608 Metric)", Power (Watts)="0.1W, 1/10W", Supplier Device Package=0603, Supplier Part Number 1=P182KHCT-ND, Temperature Coefficient=±100ppm/°C, Tolerance=±1%, Category=Resistors, ComponentLink1Description=https://industrial.panasonic.com/cdbs/www-data/pdf/RDA0000/AOA0000C298.pdf, ComponentLink1URL=https://industrial.panasonic.com/cdbs/www-data/pdf/RDA0000/AOA0000C298.pdf, Composition="Thick Film", Failure Rate=-, Features="Automotive AEC-Q200", Height - Seated (Max)="0.022\" (0.55mm)", Packaging="Cut Tape (CT)", Part Status=Active, Pricing 1="1=0.1, 10=0.021, 100=0.0087, 1000=0.00389, 2500=0.00338 (USD)", Resistance (Ohms)=182k, RoHS="RoHS Compliant", Size / Dimension="0.063\" L x 0.031\" W (1.60mm x 0.80mm)", Stock 1=140068, Supplier 1=Digi-Key
TVS1: library part TVS, "TVS DIODE 7V 12V DO214AA", Capacitance @ Frequency=-, Current - Peak Pulse (10/1000µs)=50A, Manufacturer 1="Littelfuse Inc.", Operating Temperature="-65°C ~ 150°C (TJ)", Package / Case="DO-214AA, SMB", Power - Peak Pulse=600W, Power Line Protection=No, Supplier Device Package="DO-214AA (SMBJ)", Supplier Part Number 1=SMBJ7.0ALFCT-ND, Voltage - Breakdown (Min)=7.78V, Voltage - Clamping (Max) @ Ipp=12V, Voltage - Reverse Standoff (Typ)=7V, Applications="General Purpose", Category 1="Circuit Protection", ComponentLink1Description=http://www.littelfuse.com/~/media/electronics/datasheets/tvs_diodes/littelfuse_tvs_diode_smbj_datasheet.pdf.pdf, ComponentLink1URL=http://www.littelfuse.com/~/media/electronics/datasheets/tvs_diodes/littelfuse_tvs_diode_smbj_datasheet.pdf.pdf, Description 1="TVS DIODE 7V 12V DO214AA", Manufacturer Part Number 1=SMBJ7.0A, Mounting Type="Surface Mount", Packaging="Cut Tape (CT)", Part Status=Active, Pricing 1="1=0.42, 10=0.327, 25=0.2756, 100=0.2244, 250=0.18588, 500=0.15384, 1000=0.11538 (USD)", RoHS 1="RoHS Compliant", Stock 1=18983, Supplier 1=Digi-Key, Type=Zener
U1: "IC REG LDO FIX/ADJ 1A 16QFN", Current - Limit (Min)=1.1A, Current - Output=1A, Manufacturer="Texas Instruments", Manufacturer Part Number=TPS7A7100RGTR, Operating Temperature="-40°C ~ 125°C", Package / Case="16-VFQFN Exposed Pad", Supplier Device Package="16-QFN (3x3)", Supplier Part Number 1=296-40978-1-ND, Voltage - Dropout (Typical)=-, Voltage - Input="1.425 V ~ 6.5 V", Voltage - Output="0.9 V ~ 5 V", Category="Integrated Circuits (ICs)", ComponentLink1Description=http://www.ti.com/lit/ds/symlink/tps7a7100.pdf, ComponentLink1URL=http://www.ti.com/lit/ds/symlink/tps7a7100.pdf, Mounting Type="Surface Mount", Packaging="Cut Tape (CT)", Part Status=Active, Pricing 1="1=2.19, 10=1.965, 100=1.5796, 500=1.2978, 1000=1.07532 (USD)", Regulator Topology="Positive Fixed or Adjustable", RoHS="RoHS Compliant", Stock 1=5133, Supplier 1=Digi-Key
U2: "IC MCU 32BIT 1MB FLASH 100LQFP", Manufacturer="NXP USA Inc.", Operating Temperature="-40°C ~ 105°C (TA)", Package / Case=100-LQFP, Supplier Device Package="100-LQFP (14x14)", Supplier Part Number 1=MK64FN1M0VLL12-ND, Voltage - Supply (Vcc/Vdd)="1.71 V ~ 3.6 V", Category="Integrated Circuits (ICs)", ComponentLink1Description=http://cache.freescale.com/files/microcontrollers/doc/data_sheet/K64P144M120SF5.pdf, ComponentLink1URL=http://cache.freescale.com/files/microcontrollers/doc/data_sheet/K64P144M120SF5.pdf, Connectivity="CAN, EBI/EMI, Ethernet, I²C, IrDA, SD, SPI, UART/USART, USB, USB OTG", Core Processor="ARM® Cortex®-M4", Core Size=32-Bit, Data Converters="A/D 32x16b, D/A 1x12b", EEPROM Size=-, Manufacturer Part Number=MK64FN1M0VLL12, Number of I/O=66, Oscillator Type=Internal, Packaging=Tray, Part Status=Active, Peripherals="DMA, I²S, LVD, POR, PWM, WDT", Pricing 1="1=13, 10=11.947, 100=10.7003 (USD)", Program Memory Size="1MB (1M x 8)", Program Memory Type=FLASH, RAM Size="256K x 8", RoHS="RoHS Compliant", Speed=120MHz, Stock 1=0, Supplier 1=Digi-Key
U3: library part TPL5010, "IC TIMER W/WATCHDOG 6SOT", Current - Supply=35nA, Frequency=-, Manufacturer="Texas Instruments", Manufacturer Part Number=TPL5010QDDCRQ1, Operating Temperature="-40°C ~ 125°C", Package / Case="SOT-23-6 Thin, TSOT-23-6", Supplier Device Package=TSOT-23-6, Supplier Part Number 1=296-44963-1-ND, Voltage - Supply="1.8 V ~ 5 V", Category="Integrated Circuits (ICs)", ComponentLink1Description=http://www.ti.com/lit/ds/symlink/tpl5010-q1.pdf, ComponentLink1URL=http://www.ti.com/lit/ds/symlink/tpl5010-q1.pdf, Count=-, Mounting Type="Surface Mount", Packaging="Cut Tape (CT)", Part Status=Active, Pricing 1="1=1.27, 10=1.136, 100=0.886, 500=0.73192, 1000=0.57783 (USD)", RoHS="RoHS Compliant", Stock 1=2785, Supplier 1=Digi-Key, Type="Programmable Timer"
U8: library part VZIGMOD2, "VNPT ZIGBEE MODULE V1 - No-PA", Frequency=2.4GHz, Manufacturer=VNPT-Technology, Operating Temperature="-40°C ~ 85°C", Package / Case="33-SMD Module", Power - Output=7dBm, Voltage - Supply="1.85 V ~ 3.8 V", Antenna Type="Integrated, PCB, External", Catgory="RF/IF and RFID", Data Rate=250kbps, Manufacturer Part Number=VZIGMOD1, Module=Connectivity, Mounting Type="Surface Mount", Sensitivity=-99dBm, Serial Interfaces="I²C, SPI, UART", Utilized IC / Part=CC2538

## Via types
v1: diameter 0.6, hole 0.3, Top Layer to Bottom Layer, tented both sides, 301 vias
v2: diameter 1.2, hole 0.6, Top Layer to Bottom Layer, tented both sides, 41 vias

## Nets (pads, with @x,y where several pads share a name; then routed paths per layer and width w, separated by ;. In a path a pad name is that pad's centre, name@x,y a point inside that pad or via, vN(x,y) a via of type N, cw(c..) or ccw(c..) an arc to the next point about the centre after c; other vN are vias at no path point)
ADD_LIGHT: P7.5 U2.33 | length 77.8
  Top Layer w0.254: U2.33 69.826,52.5 70.333,51.994 v1(73.609,51.994) ; v1(127.406,29.591) 133.975,36.16 P7.5
  Bottom Layer w0.254: v1(73.609,51.994) 80.594,51.994 102.997,29.591 v1(127.406,29.591)
CLK_TH: P3.4 R10.1 U2.82 | length 53.1
  Top Layer w0.254: U2.82 84.902,47 85.293,46.609 ; v1(84.988,42.418) 85.293,42.723 85.293,46.609 ; R10.1 86.45,47 85.684,47 85.293,46.609
  Bottom Layer w0.254: v1(84.988,42.418) 103.62,23.786 P3.4
CLK_TH2: P6.4 R12.1 U2.42 | length 76.1
  Top Layer w0.254: U2.42 v1@73.177,48
  Bottom Layer w0.254: v1(73.177,48.031) 73.475,48.031 R12.1 83.242,46.806 121.996,8.052 122.911,8.052 125.962,5 P6.4
CMD_SD: J1.3 U2.4 | length 17.6
  Top Layer w0.254: U2.4 80.5,60.459 81.737,61.697 91.262,61.697 92,62.434 J1.3
DAT0_SD: J1.7 U2.2 | length 21.3
  Top Layer w0.254: U2.2 81.5,58.64 82.017,59.157 95.453,59.157 96.4,60.103 J1.7
DAT1_SD: J1.8 U2.1 | length 22.1
  Top Layer w0.254: U2.1 96.309,57.625 97.5,58.816 J1.8
DAT2_SD: J1.1 U2.6 | length 16.2
  Top Layer w0.254: U2.6 79.5,60.983 81.178,62.662 89.103,62.662 89.8,63.359 J1.1
DAT3_SD: J1.2 U2.5 | length 16.8
  Top Layer w0.254: U2.5 80,60.671 81.483,62.154 90.018,62.154 90.9,63.036 J1.2
DAT_TH: P3.3 R9.1 U2.83 | length 54.4
  Top Layer w0.254: U2.83 87.45,47.5 R9.1 87.573,45.923 86.284,45.923 85.75,45.39 85.75,41.732 v1(85.166,41.148)
  Bottom Layer w0.254: v1(85.166,41.148) 85.471,41.148 98.54,28.079 P3.3
DAT_TH2: P6.3 R11.1 U2.43 | length 72.4
  Top Layer w0.254: U2.43 72.363,47.5 v1(72.492,47.371)
  Bottom Layer w0.254: v1(72.492,47.371) 73.056,46.806 R11.1 73.905,46.101 83.16,46.101 121.54,7.721 P6.3
DONE: U2.100 U3.4 | length 9.4
  Top Layer w0.254: U2.100 92.975,56 U3.4
EN_EC: Q3.1 R20.1 U2.92 | length 86.9
  Top Layer w0.254: U2.92 85.172,52 85.725,52.553 88.417,52.553 90.373,50.597 90.373,41.046 88.875,39.548 88.849,39.573 88.798,39.522 v1(84.328,39.522)
  Top Layer w0.508: Q3.1 27.35,30.05 R20.1 27.452,31.902 v1(28.905,31.902)
  Bottom Layer w0.254: v1(28.905,31.902) 35.992,31.902 39.294,35.204 66.929,35.204 72.212,40.488 83.363,40.488 v1(84.328,39.522)
EN_PH: Q1.1 R18.1 U2.72 | length 26.1
  Top Layer w0.254: v1(80.01,39.827) 80.086,39.827 80.5,40.241 U2.72
  Top Layer w0.381: Q1.1 66.15,30.05 R18.1 67.665,31.8 v1(67.691,31.826)
  Bottom Layer w0.254: v1(67.691,31.826) 79.248,31.826 79.985,32.563 v1@79.985,39.827
EN_PH2: Q2.1 R19.1 U2.94 | length 35.6
  Top Layer w0.254: U2.94 88.707,53 90.856,50.851 90.856,40.767 88.697,38.608 v1(83.795,38.608)
  Top Layer w0.381: v1(85.55,33.17) R19.1 85.65,31.7 Q2.1
  Bottom Layer w0.254: v1(83.795,38.608) 83.795,34.925 v1(85.55,33.17)
EN_ZB: Q5.1 R22.1 U2.85 | length 57.2
  Top Layer w0.254: U2.85 87.311,48.5 v1(87.732,48.92) ; v1(116.891,73.584) 116.891,72.659 R22.1 118.45,72.65 Q5.1
  Bottom Layer w0.254: v1(87.732,48.92) 88.697,49.886 111.811,49.886 113.462,51.537 113.462,61.747 116.891,65.176 v1(116.891,73.584)
GND: C2.1 C3.1 C4.1 C5.1 C6.1 C7.2 C8.2 C9.2 C10.2 C11.2 C12.2 C13.2 C14.1 C15.2 C16.1 C17.1 C18.1 C19.1 C20.1 C21.1 C22.1 C23.1 C24.1 C25.1 C26.1 H1. H4. J1.6 J1.10 J1.11 LED1.2 P1.1 P2.3 P2.4 P3.2 P6.2 P7.2 P10.1 P10.2 P11.1 P12.1 R6.1 R13.1 R16.1 R17.1 RST1.1 TVS1.1 U1.7 U1.8 U1.9 U1.10 U1.17 U2.9 U2.24 U2.25 U2.41 U2.49 U2.60 U2.74 U2.88 U3.2 U4.6 U5.6 U6.6 U7.6 U8.1 U8.2 U8.3 U8.35
  other v1: 107.9,8.3 85.5,8.7 93.7,9.4 115.6,9.9 93.6,10.5 107.5,10.5 115.2,11 93.6,12 114.3,12.2 128.3,12.2 124.5,12.3 126.5,12.3 107.5,12.4 85.5,12.6 87,16.8 94.4,17.8 107.1,19.2 119.3,19.3 116.5,19.4 93.3,19.5 120.8,19.5 123.1,19.5 21,20.7 22.1,20.7 22.9,20.7 105.9,20.9 79.8,21 55.7,21.1 56.8,21.1 57.9,21.1 38.2,21.2 39.5,21.2 37,21.3 75.6,21.4 77.8,21.4 92.9,22.7 17.3,24.2 18.5,24.2 19.6,24.2 56.1,24.5 54.5,24.6 57.7,24.7 28.4,24.8 74.7,25 76.8,25 78.7,25.1 66.6,25.2 87.5,25.2 36.6,25.3 37.9,25.3 39,25.3 47.5,25.4 28.4,25.8 66.5,26.6 28.4,26.7 47.3,26.8 101.5,26.8 87.1,27.1 96.3,27.5 66.5,27.7 100.6,27.8 111.8,27.8 47.3,27.9 107.2,28 109.8,28 99.7,28.6 95.2,28.9 93.7,30.3 109.4,32.3 106.6,32.4 107.7,32.4 95.8,32.6 94.7,33.6 119.8,34 121.8,34.3 93.75,34.5 101.2,35.7 95.5,35.75 94.5,37 99,37.4 93.25,38 35.1,39.2 39.4,40 97.1,40 36.8,40.2 138.7,40.5 87.5,40.75 66.8,41.6 68.1,41.6 89.5,42 138.7,42.55 88.5,42.75 87.75,43.5 66.4,44.1 17.5,44.4 73.9,44.4 125.1,44.4 126.7,44.5 128.4,44.5 130.3,44.6 132.2,44.6 134.367,44.6 136.533,44.6 138.7,44.6 78.7,44.8 77.7,44.9 79.9,44.9 98.8,45.9 101.3,45.9 17.5,46 100.1,46 72.2,46.2 62.2,46.6 65.9,46.7 71.2,46.7 70.1,46.8 124,47 66.6,47.4 62.1,47.9 65.9,47.9 17.2,48.4 95.6,49 96.9,49 98,49 62,49.1 108.6,49.1 89.7,49.2 113.1,49.2 70.5,49.25 72,49.25 74.75,49.25 76,49.25 77,49.25 81.25,49.25 124,49.278 80,50 114.4,50.4 124,51.556 109.3,52.4 115.1,52.6 100.2,53 97.7,53.1 99,53.1 124,53.833 76.5,54.25 77.5,54.25 110.1,54.3 26.9,54.4 115,54.9 62.2,55 97,55 25.7,55.3 70.2,56 76,56 62.3,56.1 124,56.111 78.75,56.25 80.25,56.25 81.75,56.25 85.8,56.9 87.6,56.9 26.4,57.1 62.7,57.2 110.1,57.3 66,57.5 67.75,57.5 69.25,57.5 98.3,57.5 83.3,58.3 84.8,58.4 124,58.389 95.8,58.5 115.2,58.8 27.1,58.9 99.2,59.3 110.2,59.4 82,59.75 85,59.75 87,59.75 90,59.75 92.75,59.75 95,60 27.1,60.1 124,60.667 82.5,61 84.25,61 85.75,61 88.25,61 91,61 92.5,61 99,61.2 29.9,61.225 30.675,61.225 116.5,61.5 95.25,61.75 29.9,61.975 30.675,61.975 93.25,62 68.4,62.1 69.9,62.1 34.9,62.6 124,62.944 79.5,63 93.25,63.25 95.25,63.5 117.9,63.6 76,63.7 82.8,63.8 86.4,63.8 34.8,63.9 84.3,63.9 100,63.9 27.7,64.5 34.8,65.2 124,65.222 21.7,65.3 20.6,65.4 19.4,65.5 27.7,66.2 125,66.3 126.9,66.3 129.1,66.3 131.1,66.3 133,66.3 135.033,66.3 137.067,66.3 139.1,66.3 34.2,66.6 32.4,67.1 27.7,67.4 139.3,67.6 111.7,67.9 79.9,68.3 82.6,68.3 100,68.3 84.6,68.4 90.2,68.7 96.8,68.7 110.8,68.8 92.9,68.9 94.8,68.9 69.1,69.3 105,69.4 108.8,69.7 72,69.8 74.1,69.8 19.2,70 14.5,70.1 16.6,70.1 139.3,70.3 139.3,73.1 77.1,74.2 106.7,74.2 69.9,74.3 104.1,74.3 73.2,74.4 117.4,74.8 139.2,76.5 118.1,76.8 139.1,78.7
LED_STATUS: LED2.2 U2.98 | length 20.4
  Top Layer w0.254: LED2.2 74.524,66.314 v1(74.524,59.436) ; v1(75.091,55) U2.98
  Bottom Layer w0.254: v1(74.524,59.436) 74.524,58.039 75.091,57.471 v1(75.091,55)
NetC1_1: C1.1 U1.2 | length 1.9
  Top Layer w0.254: U1.2 30.05,58.7 C1.1
NetC4_2: C4.2 C5.2 L1.2 U1.12 U1.13 U1.14 | length 11.6
  Top Layer w0.254: C5.2 27.036,62.55 ; U1.14 27.736,61.85 27.236,62.35 ; U1.13 27.236,62.35 ; U1.12 27.536,63.05 27.036,62.55 ; 27.036,62.55 27.236,62.35
  Top Layer w0.508: C4.2 24.55,62.55 C5.2
  Top Layer w0.762: L1.2 C4.2
NetC6_2: C6.2 U1.11 | length 2.7
  Top Layer w0.254: C6.2@30,65.75 30.05,65.7 U1.11
NetC11_1: C11.1 U2.26 | length 3.7
  Top Layer w0.254: C11.1 U2.26
NetC19_2: C19.2 Q1.3 U5.1 | length 19.3
  Top Layer w0.508: U5.1 53.199,19.183 53.199,21.426 54.304,22.53 64.032,22.53 64.75,23.248 C19.2 64.75,27.1 Q1.3
NetC20_2: C20.2 Q2.3 U4.1 | length 19.8
  Top Layer w0.508: U4.1 72.46,21.482 73.508,22.53 84.032,22.53 84.75,23.248 C20.2 84.7,25.95 Q2.3
NetC23_2: C23.2 Q3.3 U6.1 | length 19.3
  Top Layer w0.508: U6.1 14.46,20.886 16.104,22.53 25.832,22.53 26.55,23.248 C23.2 26.5,25.95 Q3.3
NetC24_2: C24.2 Q4.3 U7.1 | length 19.3
  Top Layer w0.508: U7.1 33.793,21.12 35.204,22.53 44.932,22.53 45.65,23.248 C24.2 45.65,27.4 Q4.3
NetLED1_1: LED1.1 R5.1 | length 1.8
  Top Layer w0.381: LED1.1 36.35,57.11 R5.1
NetLED2_1: LED2.1 R14.2 | length 1.7
  Top Layer w0.635: R14.2 74.21,68.05 LED2.1
NetP4_1: P4.1 U4.2 | length 6.1
  Top Layer w0.508: P4.1 75,13.16 U4.2
NetP4_2: P4.2 U4.3 | length 6.1
  Top Layer w0.508: P4.2 77.54,13.16 U4.3
NetP5_1: P5.1 U5.2 | length 6.1
  Top Layer w0.635: U5.2 55.667,13.333 P5.1
NetP5_2: P5.2 U5.3 | length 6.1
  Top Layer w0.635: U5.3 58.207,13.333 P5.2
NetP8_1: P8.1 U6.2 | length 6.1
  Top Layer w0.635: P8.1 17,13.16 U6.2
NetP8_2: P8.2 U6.3 | length 6.1
  Top Layer w0.635: P8.2 19.54,13.16 U6.3
NetP9_1: P9.1 U7.2 | length 6.3
  Top Layer w0.635: U7.2 36.333,13.667 P9.1
NetP9_2: P9.2 U7.3 | length 6.3
  Top Layer w0.635: U7.3 38.873,13.667 P9.2
NetQ4_1: Q4.1 R21.1 U2.64 | length 46.3
  Top Layer w0.254: U2.64 76.5,40.289 76.937,39.853 v1(78.08,39.853)
  Top Layer w0.381: v1(46.761,33.172) 46.75,33.161 R21.1 46.75,30.05 Q4.1
  Bottom Layer w0.254: v1(46.761,33.172) 78.613,33.172 79.096,33.655 79.096,38.837 v1(78.08,39.853)
NetR3_1: R3.1 U1.3 | length 3.7
  Top Layer w0.254: U1.3 30.55,59.645 32.8,57.395 R3.1
NetR6_2: R6.2 U2.12 U2.13 | length 4.9
  Top Layer w0.254: U2.13 76,59.258 ; R6.2 76,59.258 ; U2.12 76.5,58.758 76,59.258
NetR13_2: R13.2 U2.51 | length 2.8
  Top Layer w0.254: U2.51 v1(70,43.94)
  Bottom Layer w0.254: v1(70,43.94) 70.05,43.99 R13.2
NetR16_2: R16.2 R17.2 U3.3 | length 4.2
  Top Layer w0.305: U3.3 R16.2 R17.2
NetU2_84: U2.84 U8.33 | length 40.9
  Top Layer w0.254: U2.84 v1(88.284,48) ; v1(121.533,48) 121.54,47.993 U8.33
  Bottom Layer w0.254: v1(88.284,48) v1(121.533,48)
NetU2_86: U2.86 U8.10 | length 43.9
  Top Layer w0.254: U2.86 86.592,49 v1(87.046,49.454) ; U8.10 112.65,61.492 v1(112.674,61.468)
  Bottom Layer w0.254: v1(87.046,49.454) 88.138,50.546 111.328,50.546 112.674,51.892 v1(112.674,61.468)
NetU2_87: U2.87 U8.9 | length 43.6
  Top Layer w0.254: U2.87 86,49.5 v1(86.36,49.86) ; U8.9 113.92,63.552 113.921,63.551 v1(113.944,63.551)
  Bottom Layer w0.254: v1(86.36,49.86) 87.732,51.232 110.795,51.232 111.811,52.248 111.811,61.443 113.919,63.551 v1(113.944,63.551)
NRESET: C18.2 R15.2 RST1.2 U2.52 U3.6 | length 45.6
  Top Layer w0.254: v1(70.5,40.93) U2.52 ; v1(89.484,35.662) 93.269,39.446 93.269,44.899 93.87,45.5 ; U3.6 93.025,52.375 R15.2 92.75,48.75 RST1.2 93.1,46.27 93.87,45.5 ; C18.2 93.87,45.5
  Bottom Layer w0.254: v1(70.5,40.93) 84.216,40.93 v1(89.484,35.662)
P3V3: C1.2 C2.2 C3.2 P2.1 P2.2 P12.2 R1.1 R2.1 R3.2 R4.1 R5.2 U1.1 U1.15 U1.16 | length 123.9
  Top Layer w0.254: C2.2 28.85,57.55 28.85,58.924 ; U1.15 U1.16 28.85,58.924 ; U1.1 29.55,59.624 28.85,58.924
  Top Layer w0.381: C2.2 C1.2 ; C3.2 29.55,55.65 R3.2 32.85,55.6 R5.2
  Top Layer w0.508: C2.2 28.8,56.4 C3.2 29.5,51.8 R2.1 R4.1 37.555,51.5 53.518,67.462 53.518,71.73 54.635,72.847 ; P2.2 P2.1 53.46,74.023 54.635,72.847 ; v2(61.57,72.847) 54.635,72.847
  Bottom Layer w0.508: v2(61.57,72.847) 114.249,72.847 114.74,73.338 P12.2
P3V3_MCU: C7.1 C8.1 C9.1 C10.1 C12.1 C13.1 C14.2 C15.1 C16.2 C17.2 J1.4 R1.2 R7.2 R8.2 R9.2 R10.2 R11.2 R12.2 R14.1 R15.1 U2.8 U2.22 U2.23 U2.30 U2.40 U2.48 U2.61 U2.75 U2.89 U3.1 | length 196.6
  Top Layer w0.254: C16.2 U2.48 ; C14.2 U2.40 ; C13.1 U2.30 ; U2.23 71,58.682 71.5,59.182 ; C10.1@71.4,61.05 71.5,60.95 71.5,59.182 ; U2.22 71.5,59.182 ; C8.1 78.3,59.2 78.5,59 U2.8 ; U2.89 C9.1
  Top Layer w0.305: C10.1 v2(73.399,61.043) ; U2.61 75,43.529 75.336,43.866 v1(76.048,43.866) ; U2.75 v1(82.644,42.375)
  Top Layer w0.508: R14.1 72.6,63.823 73.399,63.025 v2(73.399,61.043) ; v2(77.431,61.05) C8.1 ; v2(86.208,51.511) 87.376,51.511 88.05,50.837 C9.1 88.05,49.75 89.738,48.062 89.738,45.415 89.273,44.95 R9.2 ; J1.4 v2(93.1,66.43) ; v1(94.45,53.099) R15.1 C17.2 95.775,52.125 U3.1
  Top Layer w0.635: R1.2 32.3,44.129 33.477,42.951 v2(64.643,42.951) 64.65,42.958 C16.2 C14.2 C13.1 v2(64.65,54.908) ; R10.2 R9.2
  Bottom Layer w0.381: v2(64.643,42.951) 71.806,42.951 73.2,44.346 R11.2 R12.2 74.923,44.883 C15.1 81.933,43.891 C12.1 81.991,43.028 v1(82.644,42.375)
  Bottom Layer w0.508: v2(64.65,54.908) 64.65,60.408 65.285,61.043 v2(73.399,61.043) ; R7.2 R8.2 73.399,55.351 v2(73.399,61.043) ; C7.1 93.033,66.497 v2(93.1,66.43) 78.774,66.43 77.431,65.086 v2(77.431,61.05) ; v1(94.45,53.099) 87.617,53.099 86.208,51.689 v2(86.208,51.511) 84.912,51.511 81.953,54.47 79.032,54.47 77.431,56.072 v2(77.431,61.05) ; v2(73.399,61.043) 73.405,61.05 v2(77.431,61.05)
P3V3_SS: C21.2 C22.2 C25.2 P3.1 P6.1 P7.1 Q1.2 Q2.2 Q3.2 Q4.2 R2.2 R18.2 R19.2 R20.2 R21.2 | length 181.2
  Top Layer w0.635: Q3.2 25.65,30.05 R20.2 25.65,33.499 26.391,34.239 28.917,34.239 29.8,35.122 ; R2.2 29.8,35.122 ; Q4.2 45.05,30.05 R21.2 45.05,33.671 ; Q1.2 64.45,30.05 R18.2 64.45,33.614 ; Q2.2 83.85,30.05 R19.2 83.85,33.193 82.855,34.188 ; P3.1 88.25,5.13 C21.2 88.25,13.142 90.041,14.933 ; P6.1 111.25,5.13 C22.2 111.25,14.933 ; P7.1 133.91,15.75 C25.2 112.067,15.75 111.25,14.933 ; 29.8,35.122 30.683,34.239 44.482,34.239 45.05,33.671 ; 45.05,33.671 45.568,34.188 63.876,34.188 64.45,33.614 ; 64.45,33.614 65.024,34.188 82.855,34.188 ; 82.855,34.188 84.303,35.636 87.274,35.636 90.041,32.87 90.041,14.933 ; 90.041,14.933 111.25,14.933
P3V3_ZB: Q5.2 R4.2 R22.2 | length 92.7
  Top Layer w0.762: R4.2 38.426,49.5 59.876,70.95 v2(63.203,70.95) ; v2(115.756,70.95) R22.2 118.45,70.95 Q5.2
  Bottom Layer w0.762: v2(63.203,70.95) v2(115.756,70.95)
P3V3_ZBE: C26.2 Q5.3 U8.4 | length 6.5
  Top Layer w0.635: U8.4 120.27,67.62 C26.2 Q5.3
P5V0: L1.1 P1.2 TVS1.2 | length 9.9
  Top Layer w0.762: 10.2,61.92 11.08,62.8 L1.1
RX_DBG_ZB: P11.2 U8.23 | length 4.1
  Top Layer w0.254: P11.2 108.84,41.34 U8.23
RX_EC: U2.91 U6.4 | length 70.1
  Top Layer w0.254: v1(74.041,50.876) 74.665,51.5 U2.91
  Bottom Layer w0.254: U6.4 30.007,36.89 43.896,50.779 73.944,50.779 v1(74.041,50.876)
RX_EC2: P2.6 U2.63 U7.4 | length 89.1
  Top Layer w0.254: U7.4 49.285,36.89 51.689,39.294 v1(53.924,39.294) 70.46,39.294 70.917,39.751 75.286,39.751 76,40.465 U2.63 ; v1(53.924,49.759) 53.924,57.861 64.643,68.58 64.643,76.454 63.805,77.292 59.818,77.292 P2.6
  Bottom Layer w0.254: v1(53.924,39.294) v1(53.924,49.759)
RX_PH: U2.76 U5.4 | length 30.9
  Top Layer w0.254: U5.4 69.783,36.89 71.526,38.633 82.525,38.633 83.625,39.734 U2.76
RX_PH2: U2.96 U4.4 | length 37.1
  Top Layer w0.254: U4.4 89.874,36.89 91.846,38.862 91.846,51.587 89.434,54 U2.96
SCL_LIGHT: P7.4 R7.1 U2.31 | length 75
  Top Layer w0.254: U2.31 v1(71.001,53.5)
  Bottom Layer w0.254: v1(71.001,53.5) 71.051,53.55 R7.1 72.794,52.756 80.67,52.756 102.346,31.08 P7.4
SD_CD: J1.9 U2.7 | length 30.1
  Top Layer w0.254: U2.7 79,61.2 80.868,63.068 88.568,63.068 88.9,63.4 88.9,66.9 89.5,67.5 98.1,67.5 98.6,67 J1.9
SD_CLK: J1.5 U2.3 | length 19.6
  Top Layer w0.254: U2.3 81,59.588 81.813,60.401 93.447,60.401 94.2,61.155 J1.5
SDA_LIGHT: P7.3 R8.1 U2.32 | length 87
  Top Layer w0.254: U2.32 70.52,53 70.866,52.654 73.787,52.654 v1(74.651,53.518)
  Bottom Layer w0.254: R8.1 74.618,53.55 v1(74.651,53.518) ; v1@74.651,53.55 80.765,53.55 101.016,33.299 136.093,33.299 137.338,32.055 137.338,29.338 P7.3
SWD_CLK: P2.7 U2.34 | length 32
  Top Layer w0.305: v1(65.811,53.086) 66.897,52 U2.34
  Bottom Layer w0.305: P2.7 59.715,74.665 59.715,54.204 60.833,53.086 v1(65.811,53.086)
SWD_DIO: P2.5 U2.37 | length 33.3
  Top Layer w0.305: v1(65.481,52.222) 67.204,50.5 U2.37
  Bottom Layer w0.305: P2.5 58.54,54.033 60.35,52.222 v1(65.481,52.222)
TCK: P12.4 U8.6 | length 12.8
  Top Layer w0.254: P12.4 112.2,71.747 117.73,66.217 U8.6
TDI: P12.6 U8.8 | length 12.8
  Top Layer w0.254: P12.6 109.66,71.848 115.19,66.318 U8.8
TDO: P12.3 U8.7 | length 15.7
  Top Layer w0.254: P12.3 111.1,77.47 111.1,71.628 116.46,66.268 U8.7
TMS: P12.5 U8.5 | length 17.5
  Top Layer w0.254: v1(113.081,74.117) 113.081,72.212 119,66.293 U8.5
  Bottom Layer w0.254: P12.5 110.998,77.232 110.998,75.057 111.938,74.117 v1(113.081,74.117)
TX_DBG_ZB: P11.3 U8.24 | length 4.4
  Top Layer w0.254: U8.24 110.11,41.93 P11.3
TX_EC: U2.90 U6.5 | length 73.4
  Top Layer w0.254: v1(72.517,51.359) 73.635,50.241 74.498,50.241 75.257,51 U2.90
  Bottom Layer w0.254: U6.5 18.313,38.202 30.354,38.202 43.51,51.359 v1(72.517,51.359)
TX_EC2: P2.8 U2.62 U7.5 | length 89